# Altium PCB FPC_CAP_Water_Level.pcbdoc
Units mil, origin at the board's own origin, x right, y up, seen from the top; angles counter-clockwise.
Board outline 2985 x 5160 mil, 2 copper layers (Top Layer, Bottom Layer); 39 components, 38 nets, 123 pads, 57 vias.
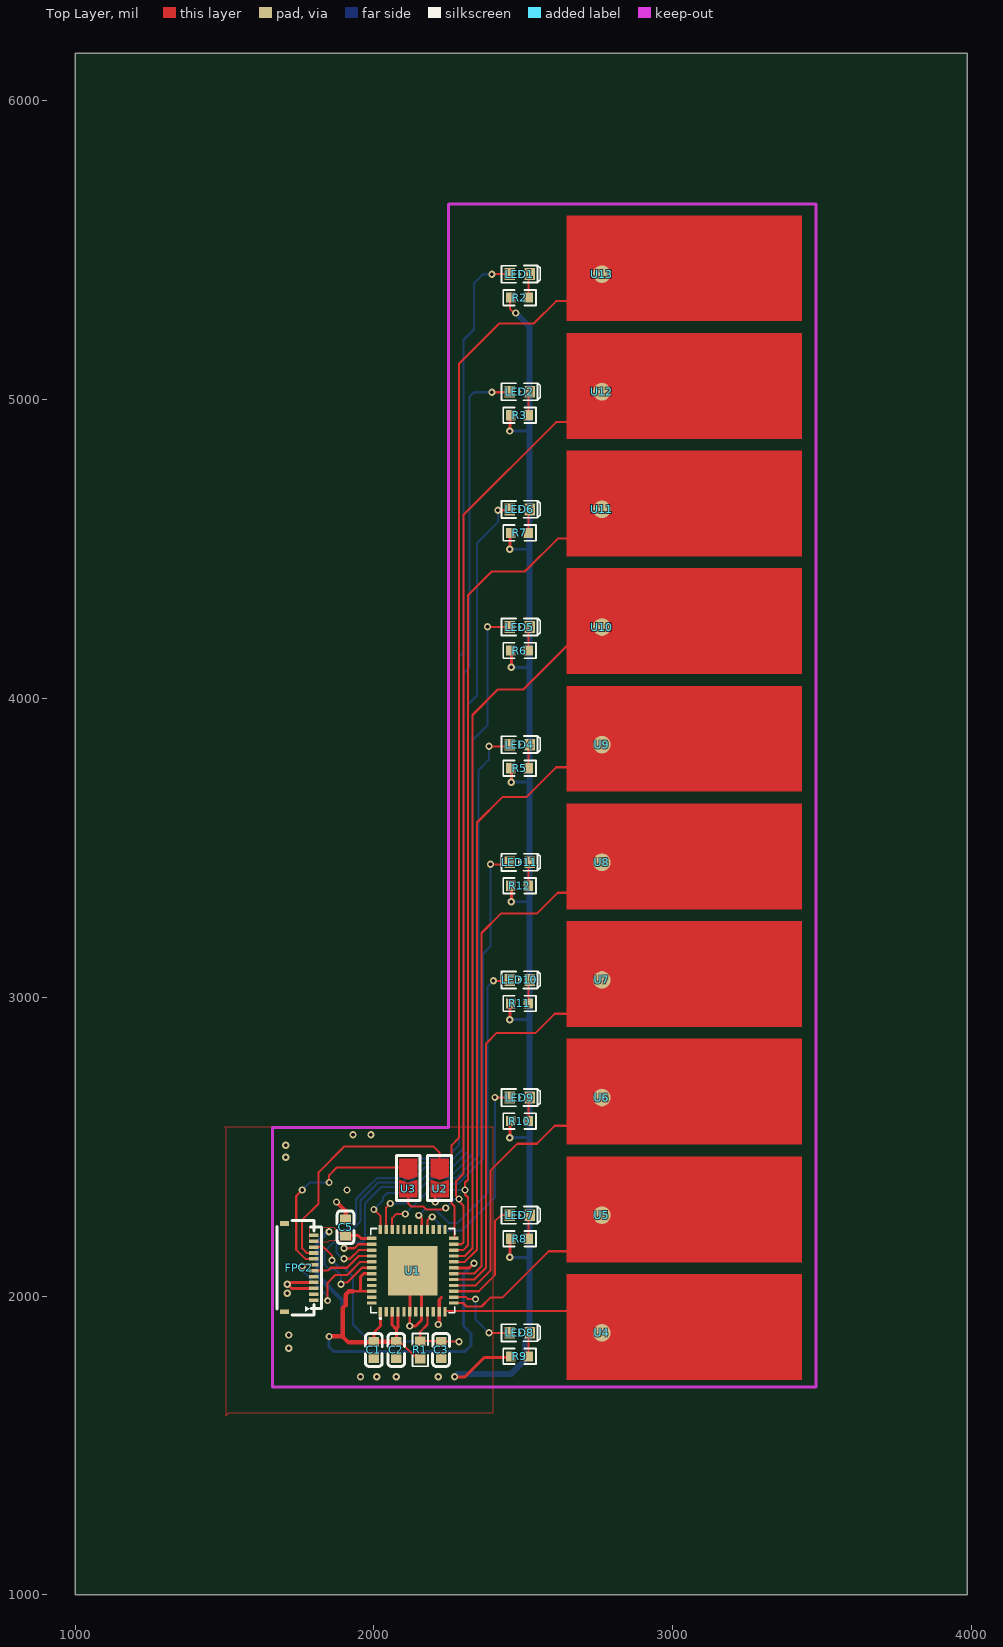
[diagram p0: Top Layer view]
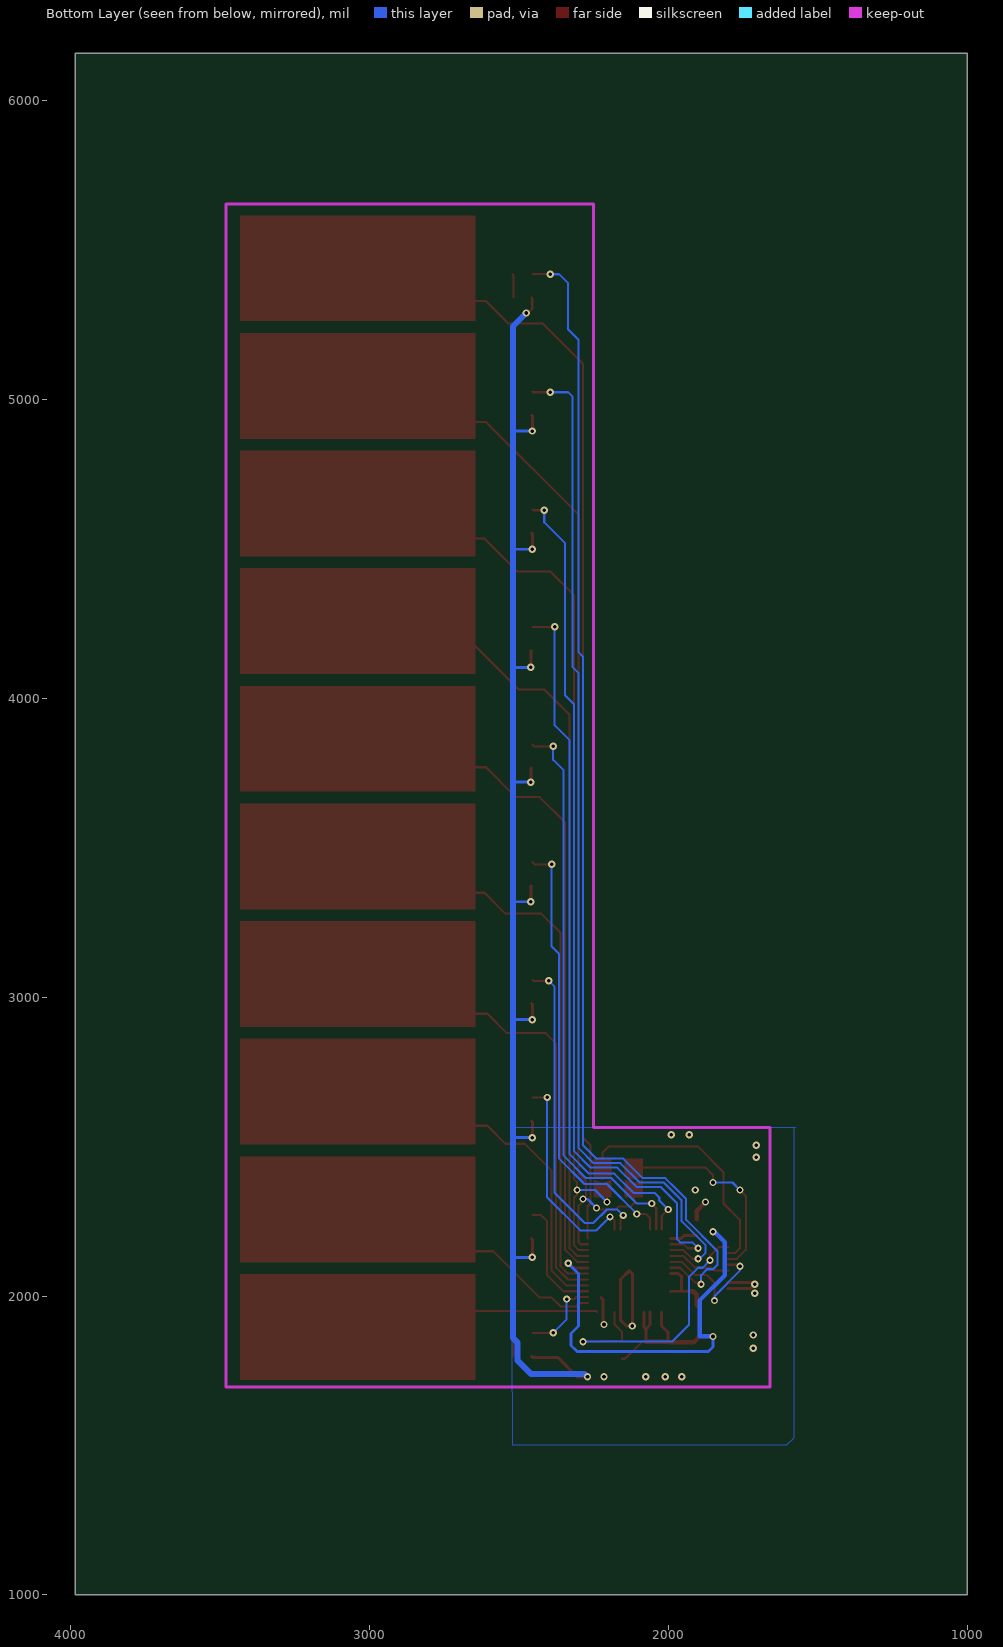
[diagram p1: Bottom Layer view, seen from below]

## Layer stack, top to bottom
Top Layer: signal copper (thickness not stored)
Dielectric: dielectric 12.6, FR-4, Dk 4.8
Bottom Layer: signal copper (thickness not stored)

## Board outline
3985,1000 1000,1000 1000,6160 3985,6160

## Components (designator, comment, footprint, x,y, rotation, side; value= is the part's Value field where it differs from the comment)
C1 "10uF" C0603 2000,1820 r90 top
C2 "100nF" C0603 2075,1820 r90 top
C3 "100nF" C0603 2225,1820 r90 top
C5 "100nF" C0603 1905,2230 r270 top
FPC2 "0.5K-HX-12PWB" FPC-SMD_12P-P0.50_HDGC_0.5K-HX-12PWB 1750,2095 r270 top
LED1 "LED-0603_R" LED0603_RED 2487.52,5420.35 r0 top
LED2 "LED-0603_R" LED0603_RED 2487.52,5026.65 r0 top
LED4 "LED-0603_R" LED0603_RED 2487.52,3845.55 r0 top
LED5 "LED-0603_R" LED0603_RED 2487.52,4239.25 r0 top
LED6 "LED-0603_R" LED0603_RED 2487.52,4632.95 r0 top
LED7 "LED-0603_R" LED0603_RED 2487.52,2270.75 r0 top
LED8 "LED-0603_R" LED0603_RED 2487.52,1877.05 r0 top
LED9 "LED-0603_R" LED0603_RED 2487.52,2664.45 r0 top
LED10 "LED-0603_R" LED0603_RED 2487.52,3058.15 r0 top
LED11 "LED-0603_R" LED0603_RED 2487.52,3451.85 r0 top
R1 "10K" R0603 2155,1820 r270 top
R2 "1k" R0603 2487.52,5341.61 r180 top
R3 "1k" R0603 2487.52,4947.91 r180 top
R5 "1k" R0603 2487.52,3766.81 r180 top
R6 "1k" R0603 2487.52,4160.51 r180 top
R7 "1k" R0603 2487.52,4554.21 r180 top
R8 "1k" R0603 2487.52,2192.01 r180 top
R9 "1k" R0603 2487.52,1798.31 r180 top
R10 "1k" R0603 2487.52,2585.71 r180 top
R11 "1k" R0603 2487.52,2979.41 r180 top
R12 "1k" R0603 2487.52,3373.11 r180 top
U1 "ESP32-PICO-D4" "ESP32 PICO" 2130,2085 r0 top
U2 "短路点 0603" 短路点 2220,2360 r90 top
U3 "短路点 0603" 短路点 2115,2360 r90 top
U4 "测试点" 测试点 2763.11,1877.05 r0 top
U5 "测试点" 测试点 2763.11,2270.75 r0 top
U6 "测试点" 测试点 2763.11,2664.45 r0 top
U7 "测试点" 测试点 2763.11,3058.15 r0 top
U8 "测试点" 测试点 2763.11,3451.85 r0 top
U9 "测试点" 测试点 2763.11,3845.55 r0 top
U10 "测试点" 测试点 2763.11,4239.25 r0 top
U11 "测试点" 测试点 2763.11,4632.95 r0 top
U12 "测试点" 测试点 2763.11,5026.65 r0 top
U13 "测试点" 测试点 2763.11,5420.35 r0 top

## Footprints (in the part's own frame and the unit in brackets; to place one, negate y for a bottom-side part, rotate by r counter-clockwise, add the part's x,y. Pads: shape width x height; smd on the part's side, far side on the other; paste and mask are expansions set on the pad)
C0603 [mm]
  rect 0.8x0.9 smd paste+0 mask+0.051: 1(-0.7,0) 2(0.7,0)
  silkscreen extent -1.41,-0.71 1.39,0.72
"ESP32 PICO" [mm]
  rect 0.28x0.8 smd paste-100 mask+0.051: 1(-2.75,-3.5) 2(-2.25,-3.5) 3(-1.75,-3.5) 4(-1.25,-3.5) 5(-0.75,-3.5) 6(-0.25,-3.5) 7(0.25,-3.5) 8(0.75,-3.5) 9(1.25,-3.5) 10(1.75,-3.5) 11(2.25,-3.5) 12(2.75,-3.5) 25(2.75,3.5) 26(2.25,3.5) 27(1.75,3.5) 28(1.25,3.5) 29(0.75,3.5) 30(0.25,3.5) 31(-0.25,3.5) 32(-0.75,3.5) 33(-1.25,3.5) 34(-1.75,3.5) 35(-2.25,3.5) 36(-2.75,3.5)
  rect 0.8x0.28 smd paste-100 mask+0.051: 13(3.5,-2.75) 14(3.5,-2.25) 15(3.5,-1.75) 16(3.5,-1.25) 17(3.5,-0.75) 18(3.5,-0.25) 19(3.5,0.25) 20(3.5,0.75) 21(3.5,1.25) 22(3.5,1.75) 23(3.5,2.25) 24(3.5,2.75) 37(-3.5,2.75) 38(-3.5,2.25) 39(-3.5,1.75) 40(-3.5,1.25) 41(-3.5,0.75) 42(-3.5,0.25) 43(-3.5,-0.25) 44(-3.5,-0.75) 45(-3.5,-1.25) 46(-3.5,-1.75) 47(-3.5,-2.25) 48(-3.5,-2.75)
  rect 4.2x4.2 smd paste-100 mask+0.051: 49(0,0)
  silkscreen extent -3.58,-4.11 3.58,3.58
FPC-SMD_12P-P0.50_HDGC_0.5K-HX-12PWB [mm]
  rect 0.3x0.8 smd paste+0 mask+0.05: 1(2.75,1.25) 2(2.25,1.25) 3(1.75,1.25) 4(1.25,1.25) 5(0.75,1.25) 6(0.25,1.25) 7(-0.25,1.25) 8(-0.75,1.25) 9(-1.25,1.25) 10(-1.75,1.25) 11(-2.25,1.25) 12(-2.75,1.25)
  rect 0.4x0.8 smd paste+0 mask+0.05: 13(-3.75,-1.25) 14(3.75,-1.25)
  silkscreen extent -4,-1.87 4,1.89
LED0603_RED [mm]
  rect 0.9x1 smd paste+0 mask+0.051: 1(-0.85,0) 2(0.85,0)
  silkscreen extent -1.54,-0.73 1.75,0.73
R0603 [mil]
  rect 31.75x34.02 smd paste-3937.01 mask+2: 1(-29.65,0) 2(29.65,0)
  silkscreen extent -55,-26 55,26
测试点 [mm]
  round 1.5 smd paste+0 mask+0.102: 1(0,0)
短路点 [mil]
  Top Layer region: -30,30 30,30 19.68,0 30,-30 -30,-30
  Top Layer region: 29.84,0 40,30 100,30 100,-30 40,-30
  silkscreen extent -40,-40 110,40

## Via types
v1: diameter 24.41, hole 12.2, Top Layer to Bottom Layer, tented both sides, 57 vias

## Nets (pads, with @x,y where several pads share a name; then routed paths per layer and width w, separated by ;. In a path a pad name is that pad's centre, name@x,y a point inside that pad or via, vN(x,y) a via of type N, cw(c..) or ccw(c..) an arc to the next point about the centre after c; other vN are vias at no path point)
3V3: C1.2 C2.2 C5.2 FPC2.11 FPC2.12 R1.2 U1.1 U1.3 U1.4 U1.19 U1.37 U1.43 U1.46 | length 2379.1
  Top Layer w7: C2.2 2087.4,1847.6 2144.7,1790.3 R1.2
  Top Layer w10: C5.2 1947.56,2202.44 1956.73,2193.27 U1.37 ; 1930,2016.6 U1.46 ; 1956.9,2016.4 1955,2016.4 1955,2065 1965.2,2075.2 U1.43 ; C1.2 2000,1878.28 2021.72,1900 U1.1 ; U1.3 2061.09,1903.12 2075,1889.21 ; C2.2 2075,1889.21 ; U1.4 2080.78,1895 2075,1889.21 ; U1.19 2319.85,2094.85 v1(2335,2110)
  Top Layer w15: v1(1850,1865) 1895,1865 ; 1930,2016.6 1916.6,2016.6 1905,2005 1905,1970 1895,1960 1895,1865 ; C2.2 C1.2 1997.44,1845 1915,1845 1895,1865
  Bottom Layer w10: v1(1850,1865) 1850,1830 1865,1815 2305,1815 2325,1835 2325,1875 2300,1900 2300,2075 v1(2335,2110)
  Bottom Layer w15: v1(1850,1865) 1895,1865 1895,1985 1810,2070 1810,2180 1845,2215 v1(1850,2215)
EN: C3.2 FPC2.10 R1.1 U1.9 | length 957.7
  Top Layer w7: FPC2.10 1831.11,2163.89 1840,2155 1860,2135 v1(1860,2120) ; U1.9 2179.2,1905 2155,1880.8 R1.1 2222.9,1849.66 C3.2 v1(2285,1847.56)
  Bottom Layer w7: v1(1860,2120) 1885,2095 1900,2095 1930,2064.8 1930,1905 1987.4,1847.6 v1(2285,1847.56)
FPC2_8: FPC2.8 | length 680.8
  Top Layer w7: v1(1760,2355) 1740,2335 1740,2155 1770.48,2124.52 FPC2.8 ; v1(1850,2380) 1850,2405 1875,2430 2115,2430
  Bottom Layer w7: v1(1760,2355) 1785,2380 v1(1850,2380)
FPC2_9: FPC2.9 | length 822
  Top Layer w7: FPC2.9 1775.8,2144.2 1760,2160 1760,2255 1815,2310 1815,2415 1900,2500 2200,2500 2220,2480 2220,2430
GND: C1.1 C2.1 C3.1 C5.1 FPC2.3 FPC2.4 FPC2.13 FPC2.14 R2.2 R3.2 R5.2 R6.2 R7.2 R8.2 R9.2 R10.2 R11.2 R12.2 U1.6 U1.8 U1.11 U1.49 | length 5776.8
  Top Layer w7: R2.2 2455,5338.75 2455,5305 2470,5290 v1(2475,5290)
  Top Layer w10: v1(1710,2040) 1723.9,2026.1 FPC2.3 ; v1@1720,2045.78 FPC2.4 ; v1(2270,1730) 2305,1730 2370,1795 2454.55,1795 R9.2 ; v1(2455,2130) 2455,2189.15 R8.2 ; v1(2455,2530) 2455,2582.85 R10.2 ; v1(2455,2925) 2455,2976.55 R11.2 ; v1(2455,4500) 2455,4551.35 R7.2 ; v1(2455,4895) 2455,4905 2455,4945.05 R3.2 ; R12.2 2460,3370.97 v1(2460,3320) ; R5.2 2460,3764.67 v1(2460,3720) ; R6.2 2460,4158.37 v1(2460,4105) ; v1(2120,1900) 2120,1947.05 U1.6 2120.16,2075.16 U1.49 2159.53,2055.47 U1.8 2159.5,1919.5 2140,1900 v1(2120,1900)
  Top Layer w11: v1(2215,1905) 2218.57,1908.58 U1.11 2218.57,1988.58 2225,1995
  Top Layer w15: v1@1880,2310 v1(1875,2315) 1905,2285 C5.1
  Bottom Layer w10: v1(2455,2130) 2520,2129.2 ; v1(2455,2530) 2520,2530.9 ; v1(2455,2925) 2520,2925.2 ; v1(2455,4500) 2520,4499.5 ; v1(2455,4895) 2456.03,4896.03 2520,4896.03 ; v1(2460,3320) 2520,3319.2 ; v1(2460,3720) 2520,3720.5 ; v1(2460,4105) 2461.47,4103.53 2520,4103.53
  Bottom Layer w20: v1(2270,1730) 2280,1740 2460,1740 2505,1785 2505,1845 2520,1860 2520,5245 v1(2475,5290)
  other v1: 1955,1730 2010,1730 2075,1730 2215,1730 1715,1825 1715,1870 1710,2010 1910,2355 1705,2465 1705,2505 1930,2540 1990,2540
LED0: LED8.1 U1.14 | length 275.5
  Top Layer w7: U1.14 2308.6,1996.4 2315,1990 v1(2340,1990) ; v1(2385,1877.05) LED8.1
  Bottom Layer w7: v1(2340,1990) 2340,1922.05 v1(2385,1877.05)
LED1: LED7.1 U1.15 | length 397.2
  Top Layer w7: U1.15 2351.11,2016.11 2405,2070 2405,2250 2425.75,2270.75 LED7.1
LED2: LED9.1 U1.28 | length 710.2
  Top Layer w7: U1.28 2179.2,2254.2 2190,2265 v1(2195,2265) ; v1(2405,2665) 2405.55,2664.45 LED9.1@2454.05,2664.45
  Bottom Layer w7: v1(2195,2265) 2240,2220 2295,2220 2405,2330 v1(2405,2665)
LED2_2: LED2.2 R3.1 | length 80.3
  Top Layer w7: R3.1 2517.18,5022.85 LED2.2
LED3: LED10.1 U1.29 | length 1123.5
  Top Layer w7: v1(2150,2270) 2160,2260 2160,2223.27 U1.29 ; v1(2400,3055) 2450.9,3055 LED10.1
  Bottom Layer w7: v1(2150,2270) 2170,2290 2205,2290 2250,2245 2280,2245 2380,2345 2380,3035 v1(2400,3055)
LED4: LED11.1 U1.34 | length 1486.8
  Top Layer w7: U1.34 2061.09,2261.09 2075,2275 v1(2105,2275) ; v1(2390,3445) 2447.2,3445 LED11.1
  Bottom Layer w7: v1(2105,2275) 2205,2375 2280,2375 2365,2460 2365,2535 2365,3145 2390,3170 v1(2390,3445)
LED5: LED4.1 U1.35 | length 1911.1
  Top Layer w7: U1.35 2040,2224.2 2040,2295 v1(2055,2310) ; v1(2385,3840) 2448.5,3840 LED4.1
  Bottom Layer w7: v1(2055,2310) 2105,2310 2190,2395 2275,2395 2350,2470 2350,3760 2385,3795 v1(2385,3840)
LED6: LED5.1 U1.36 | length 2348.5
  Top Layer w7: v1(2000,2290) 2021.7,2268.3 U1.36 ; v1(2380,4240) LED5.1@2454.1,4239.3
  Bottom Layer w7: v1(2000,2290) 2030,2320 2030,2330 2045,2345 2115,2345 2180,2410 2265,2410 2330,2475 2330,3860 2380,3910 v1(2380,4240)
LED6_2: LED6.2 R7.1 | length 80.3
  Top Layer w7: R7.1 2517.18,4629.15 LED6.2
LED7: LED6.1 U1.38 | length 2944.4
  Top Layer w7: v1(1900,2160) 1935,2160 1948.58,2173.58 U1.38 ; v1(2415,4630) 2451.1,4630 LED6.1
  Bottom Layer w7: v1(1900,2160) 1920,2180 1960,2180 1970,2190 1970,2310 1995,2335 2025,2365 2105,2365 2170,2430 2260,2430 2315,2485 2315,3980 2345,4010 2345,4520 2415,4590 v1(2415,4630)
LED8: LED2.1 U1.39 | length 6381.9
  Top Layer w7: v1(1900,2125) 1920,2125 1948.9,2153.9 U1.39 ; v1(2395,5025) 2452.4,5025 LED2.1
  Bottom Layer w7: v1(1900,2125) 1895,2125 1875,2145 1875,2170 1955,2250 1955,2320 1985,2350 ; 2370,5025 2335,5025 ; v1(2395,5025) 2335,5025 ; 1985,2350 2015,2380 ; 1985,2350 2015,2380 ; 2015,2380 2095,2380 ; 2015,2380 2095,2380 ; 2095,2380 2160,2445 ; 2095,2380 2160,2445 ; 2160,2445 2250,2445 ; 2160,2445 2250,2445 ; 2250,2445 2300,2495 ; 2250,2445 2300,2495 ; 2300,2495 2300,4085 ; 2300,2495 2300,4085 ; 2300,4085 2320,4105 ; 2300,4085 2320,4105 ; 2320,4105 2320,5010 ; 2320,4105 2320,5010 ; 2320,5010 2335,5025 ; 2320,5010 2335,5025
LED8_2: LED8.2 R9.1 | length 80.3
  Top Layer w7: R9.1 2517.18,1873.25 LED8.2
LED9: LED1.1 U1.42 | length 3947.6
  Top Layer w7: v1(1890,2040) 1890,2045 1910,2045 1955,2090 1959.85,2094.85 U1.42 ; v1(2395,5420) LED1.1@2454.1,5420.3
  Bottom Layer w7: v1(1890,2040) 1890,2070 1870,2090 1850,2090 1835,2105 1835,2150 1940,2255 1940,2325 1975,2360 2010,2395 2040,2395 2085,2395 2150,2460 2200,2460 2240,2460 2285,2505 2285,2600 2285,4140 2300,4155 2300,4260 2300,5200 2335,5235 2335,5390 2365,5420 v1(2395,5420)
LED11_2: LED11.2 R12.1 | length 80.3
  Top Layer w7: R12.1 2517.18,3448.05 LED11.2
R2_1: LED1.2 R2.1 | length 80.3
  Top Layer w7: R2.1 2517.18,5416.55 LED1.2
R5_1: LED4.2 R5.1 | length 80.3
  Top Layer w7: R5.1 2517.18,3841.75 LED4.2
R6_1: LED5.2 R6.1 | length 80.3
  Top Layer w7: R6.1 2517.18,4235.45 LED5.2
R8_1: LED7.2 R8.1 | length 80.3
  Top Layer w7: R8.1 2517.18,2266.95 LED7.2
R10_1: LED9.2 R10.1 | length 80.3
  Top Layer w7: R10.1 2517.18,2660.65 LED9.2
R11_1: LED10.2 R11.1 | length 80.3
  Top Layer w7: R11.1 2517.18,3054.35 LED10.2
RXD0: FPC2.6 U1.40 | length 213.3
  Top Layer w7: FPC2.6@1799.2,2085.1 1845.1,2085.1 1855,2095 1910,2095 1949.2,2134.2 U1.40
S$4276: 
TOUCH0: U1.24 U13.1 | length 3660.3
  Top Layer w7: U1.24 2270,2195.48 2270,2260 2270,2300 2260,2310 2260,2505 2285,2530 2285,5120 2420,5255 2535,5255 2610,5330 2655,5330 ; 2665,5330 2672.76,5330 U13.1 2690,5347.24 2690,5325
TOUCH1: U1.23 U12.1 | length 3695.8
  Top Layer w7: 2115,2360 2115,2310 2120,2305 2125,2300 2165,2300 2175,2290 2235,2290 v1(2240,2295) ; 2290,2312.5 2300,2302.5 ; U12.1@2763.1,5026.7 2661.5,4925 2610,4925 2300,4615 2300,2410 2275,2385 2275,2335 v1(2285,2325) 2285,2317.5 2300,2302.5 ; U1.23 2293.6,2173.6 ; U1.23 2293.6,2173.6 ; U1.23 2293.6,2173.6 ; 2293.6,2173.6 2300,2180 ; 2293.6,2173.6 2300,2180 ; 2293.6,2173.6 2300,2180 ; 2300,2180 2300,2302.5 ; 2300,2180 2300,2302.5 ; 2300,2180 2300,2302.5
  Bottom Layer w7: v1(2240,2295) 2270,2325 v1(2285,2325)
TOUCH2: U1.22 U11.1 | length 3122.3
  Top Layer w7: v1(2205,2315) 2205,2345 2220,2360 ; U1.22 2298.91,2153.91 2315,2170 ; 2315,2320 2315,2170 ; U11.1 2665.16,4535 2615,4535 2505,4425 2395,4425 2315,4345 2315,2390 2305,2380 v1(2305,2355) 2305,2340 2315,2330 2315,2170
  Bottom Layer w7: v1(2205,2315) 2245,2355 v1(2305,2355)
TOUCH3: U1.21 U10.1 | length 2412.9
  Top Layer w7: U1.21 2304.2,2134.2 2330,2160 2330,3505 2330,3945 2415,4030 2500,4030 2709.3,4239.3 U10.1@2763.1,4239.3
TOUCH4: U1.20 U9.1 | length 2050
  Top Layer w7: U1.20 2304.53,2114.53 2340,2150 2345,2155 2345,3585 2430,3670 2510,3670 2610,3770 2687.6,3770 U9.1@2763.1,3845.5
TOUCH5: U1.18 U8.1 | length 1718.7
  Top Layer w7: U1.18 2335.2,2075.2 2360,2100 2360,3215 2425,3280 2545,3280 2615,3350 2661.3,3350 U8.1@2763.1,3451.9
TOUCH6: U1.17 U7.1 | length 1349.9
  Top Layer w7: U1.17 2335.5,2055.5 2375,2095 2375,2845 2410,2880 2540,2880 2605,2945 2650,2945 U7.1@2763.1,3058.1
TOUCH7: U1.16 U6.1 | length 952
  Top Layer w7: U1.16 2340.8,2035.8 2390,2085 2390,2420 2480,2510 2545,2510 2605,2570 2668.66,2570 U6.1
TOUCH8: U1.13 U5.1 | length 640
  Top Layer w7: U1.13 2298.3,1976.7 2310,1965 2360,1965 2390,1995 2430,1995 2585,2150 2665,2150 2763.1,2248.1 U5.1@2763.1,2270.7
TOUCH9: U1.12 U4.1 | length 609.9
  Top Layer w7: U1.12 2241.06,1950 2720,1950
  Top Layer w10: 2705,1980 2763.11,1921.89 U4.1
TXD0: FPC2.7 U1.41 | length 427.4
  Top Layer w7: v1(1760,2100) 1764.84,2104.84 FPC2.7 ; v1(1845,1985) 1845,2015 1845,2045 1870,2070 1910,2070 1954.54,2114.53 U1.41
  Bottom Layer w7: v1(1760,2100) 1760,2085 1845,2000 v1(1845,1985)
pads on no net: FPC2.1 FPC2.2 FPC2.5 U1.2 U1.5 U1.7 U1.10 U1.25 U1.26 U1.27 U1.30 U1.31 U1.32 U1.33 U1.44 U1.45 U1.47 U1.48

## Polygon pours and split planes (outlines as drawn)
GND on Bottom Layer (solid): 2525,2565 1575,2565 1580,2560 1580,1525 1605,1500 2520,1500
3V3 on Top Layer (solid): 1840,2230 1865,2230 1880,2215 1885,2210 1925,2210 1925,2185 1850,2185 1845,2180 1840,2180 1785,2180 1785,2230
GND on Top Layer (solid): 2400,2565 1500,2565 1505,2560 1505,1600 1515,1610 2400,1610

## Other copper
Top Layer:
  rectangle net TOUCH6: 2645,2900.67 3432.4,3255
  rectangle net TOUCH5: 2645,3294.37 3432.4,3648.7
  rectangle net TOUCH4: 2645,3688.07 3432.4,4042.4
  rectangle net TOUCH3: 2645,4081.77 3432.4,4436.1
  rectangle net TOUCH2: 2645,4475.47 3432.4,4829.8
  rectangle net TOUCH1: 2645,4869.17 3432.4,5223.5
  rectangle net TOUCH0: 2645,5262.87 3432.4,5617.2
  rectangle net TOUCH7: 2645,2506.97 3432.4,2861.3
  rectangle net TOUCH8: 2645,2113.27 3432.4,2467.6
  rectangle net TOUCH9: 2645,1719.57 3432.4,2073.9